# Altium PCB brushless.PcbDoc
Units mil, origin at the board's own origin, x right, y up, seen from the top; angles counter-clockwise.
Board outline 2625.03 x 1735.03 mil, 2 copper layers (Top Layer, Bottom Layer); 92 components, 82 nets, 329 pads, 108 vias.
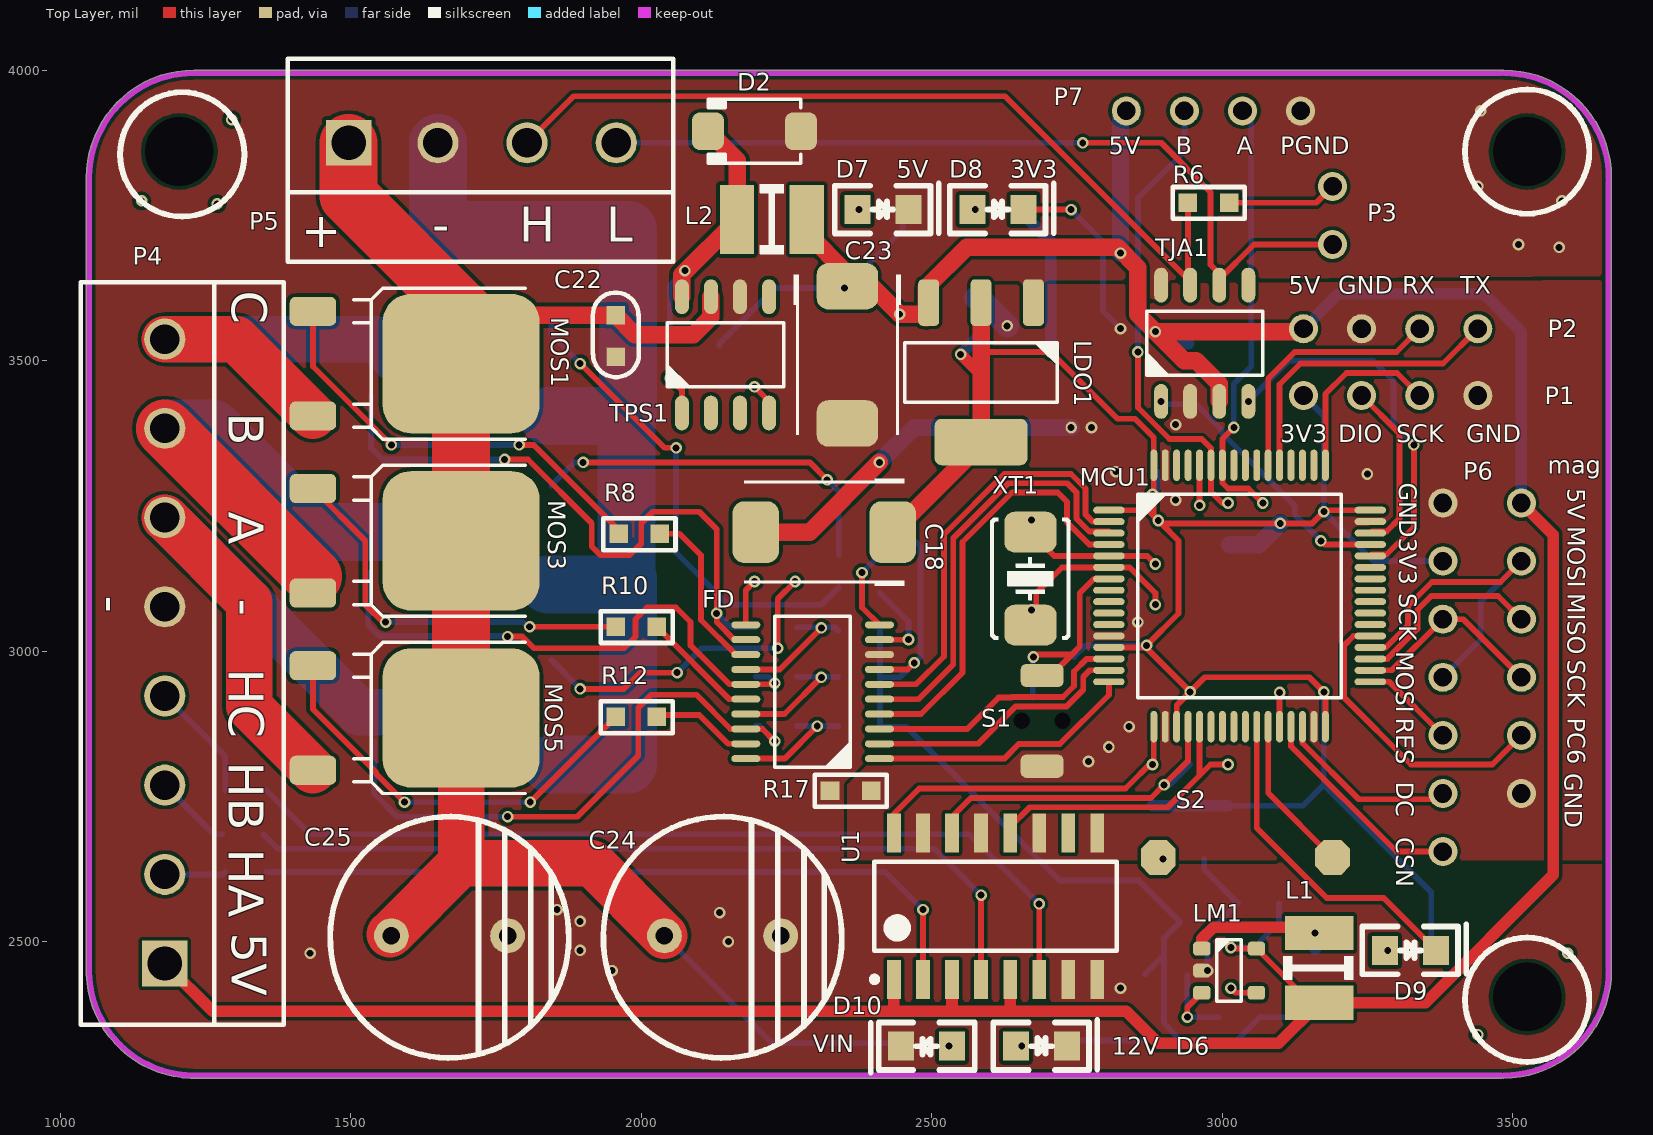
[diagram p0: Top Layer view]
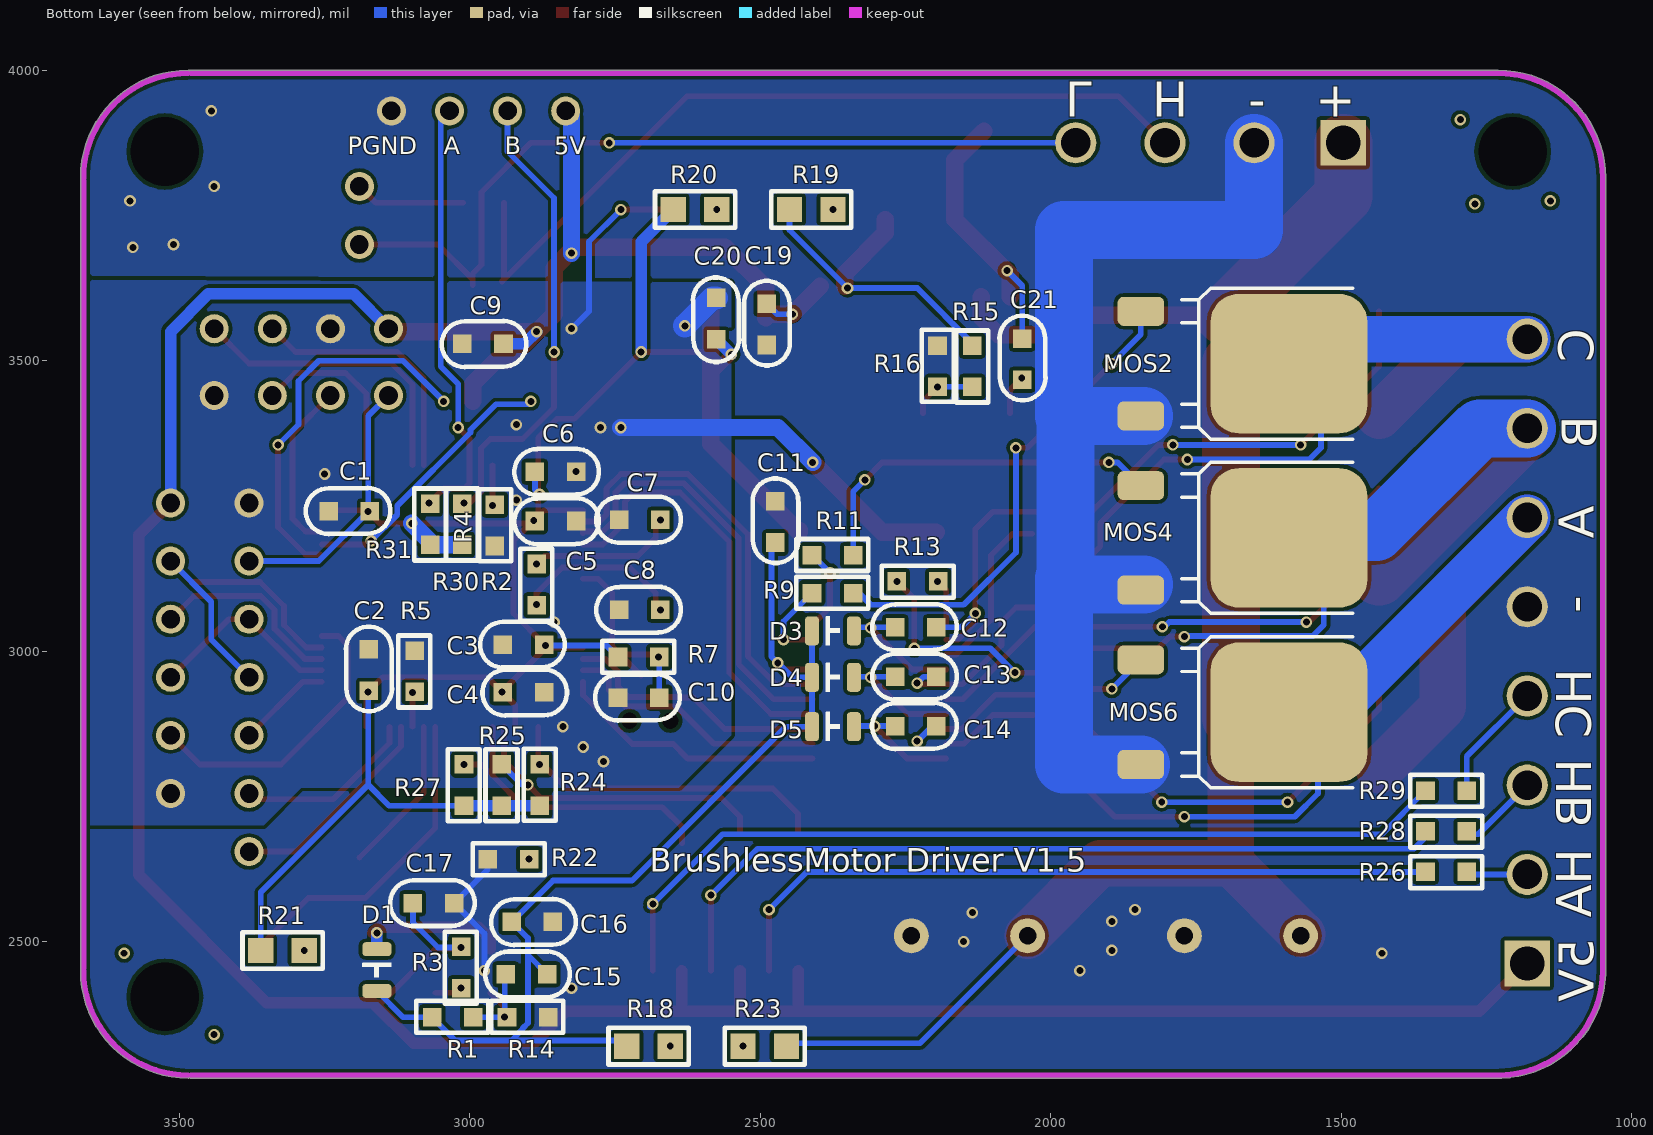
[diagram p1: Bottom Layer view, seen from below]
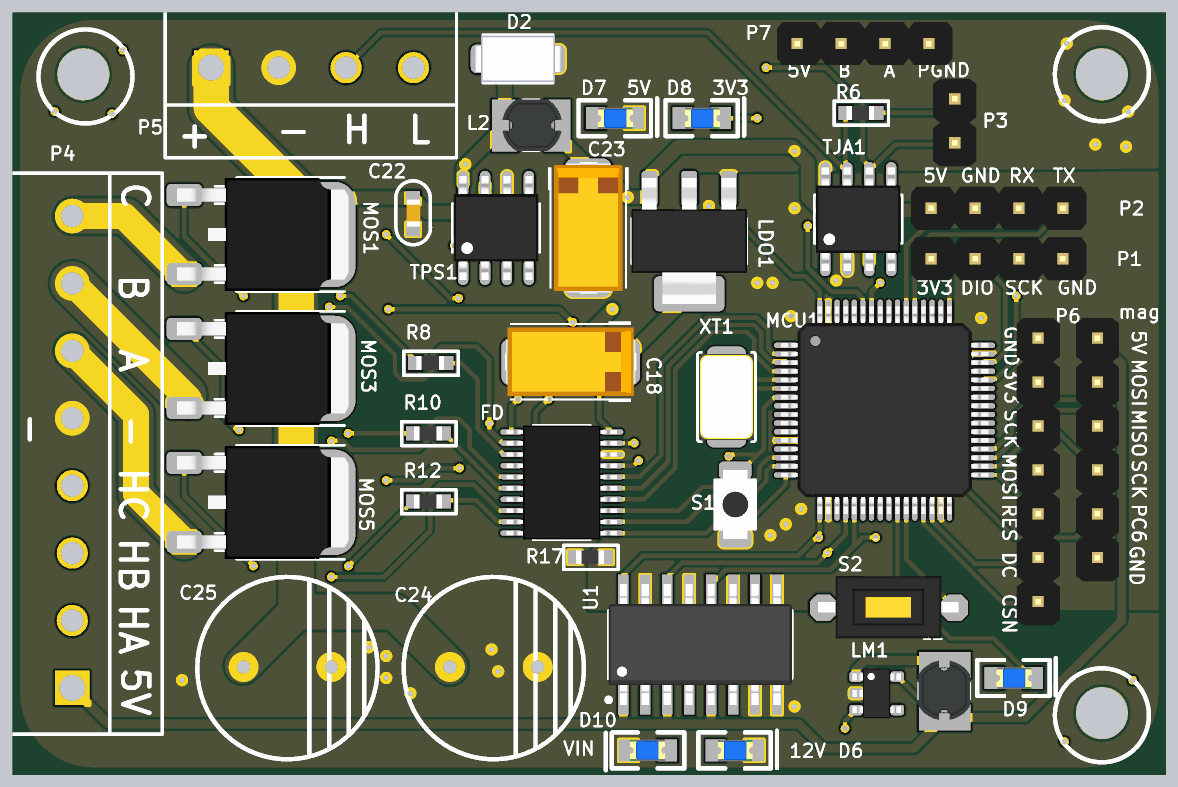
[diagram p2: 3D render of the assembled board from above, using the file's embedded part models]
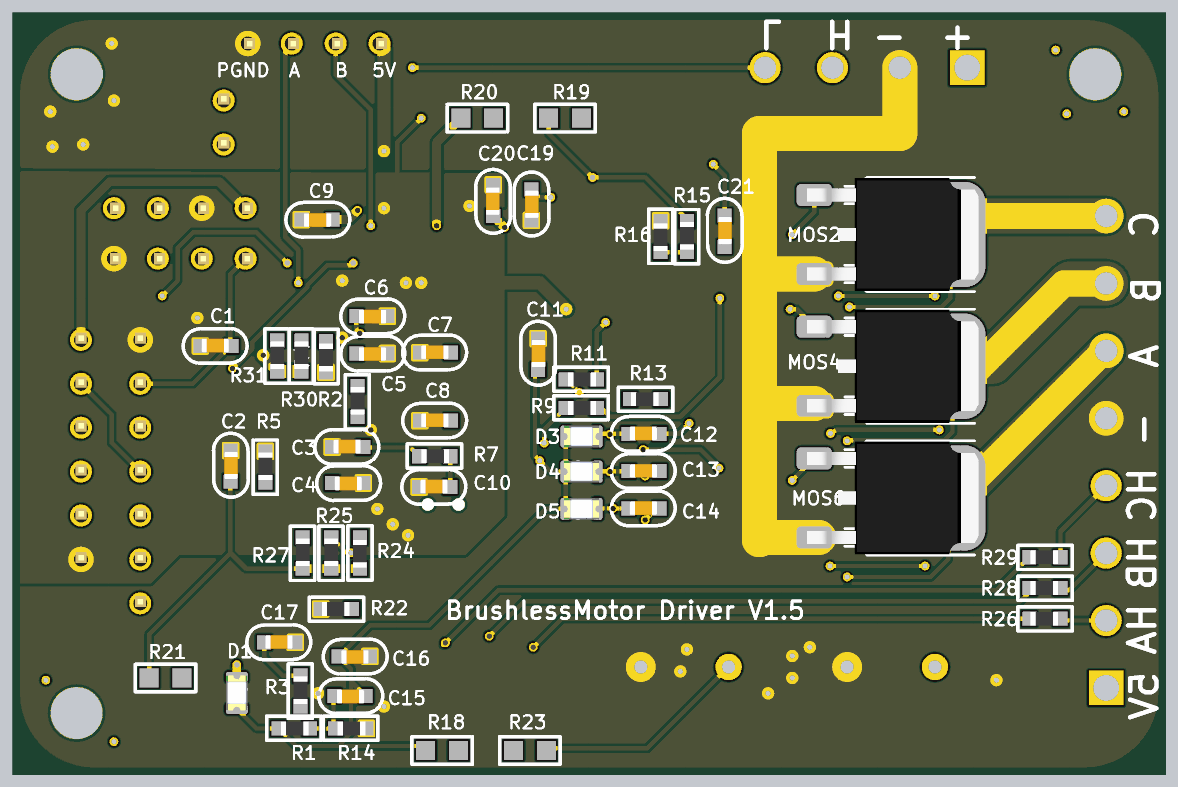
[diagram p3: 3D render of the assembled board from below, using the file's embedded part models]

## Layer stack, top to bottom
Top Solder: solder mask 0.4, Solder Resist, Dk 3.5
Top Layer: signal copper 1.4
Dielectric1: dielectric 12.6, FR-4, Dk 4.8
Bottom Layer: signal copper 1.4
Bottom Solder: solder mask 0.4, Solder Resist, Dk 3.5

## Board outline
1224.02,2265.08 ccw(c1225,2270) 1225,2264.99 3480,2264.99 ccw(c3480,2270) 3482.5,2265.65 ccw(c3485,2270) 3485,2264.99 ccw(c3485,2450) 3670.01,2450 ccw(c3665,2450) 3669.35,2452.5 ccw(c3665,2455) 3670.01,2455 3670.01,3810 ccw(c3665,3810) 3669.35,3812.5 ccw(c3665,3815) 3670.01,3815 ccw(c3485,3815) 3485,4000.01 ccw(c3485,3995) 3482.5,3999.35 ccw(c3480,3995) 3480,4000.01 1230,4000.01 ccw(c1230,3815) 1044.98,3815 1044.98,2445 ccw(c1050,2445) 1045.08,2444.02 ccw(c1230,2450)

## Design rules (kind name [scope] priority, off if disabled: settings)
Clearance [All] p1: gap=6 ignorepadtopadclearanceinfootprint=FALSE except(0: Arc-Hole Track-Hole SMDPad-Hole THPad-Hole Via-Hole Fill-Hole Poly-Hole Region-Hole Text-Hole)
PlaneConnect [All] p1: planeconnectstyle=Direct reliefexpansion=20 reliefentries=4 reliefconductorwidth=10 reliefairgap=10
PolygonConnect [All] p1: connectstyle=Direct reliefconductorwidth=10 reliefentries=4 polygonreliefangle="90 Angle" airgapwidth=10
RoutingVias [All] p1: holewidth=28 width=50 viastyle="Through Hole" minholewidth=28 minwidth=50 maxholewidth=28 maxwidth=50
SolderMaskExpansion [All] p1: expansion=4
Width [All] p1: maxlimit=100 minlimit=10 preferedwidth=10 minimp=50.000000 maximp=50.000000 favimp=50.000000
29 further rules are at their usual default settings.

## Components (designator, comment, footprint, x,y, rotation, side; value= is the part's Value field where it differs from the comment)
C1 "Cap_0603" CAP_0603 3210,3240 r180 bottom value=0.1u
C2 "Cap_0603" CAP_0603 3175,2970 r270 bottom value=0.1u
C3 "Cap_0603" CAP_0603 2910,3010 r180 bottom value=0.1u
C4 "Cap_0603" CAP_0603 2905,2930 r0 bottom value=0.1u
C5 "Cap_0603" CAP_0603 2850,3225 r0 bottom value=0.1u
C6 "Cap_0603" CAP_0603 2850,3310 r0 bottom value=0.1u
C7 "Cap_0603" CAP_0603 2710,3225 r180 bottom value=20pf
C8 "Cap_0603" CAP_0603 2710,3070 r180 bottom value=20pf
C9 "Cap_0603" CAP_0603 2975,3530 r0 bottom value=0.1uF
C10 "Cap_0603" CAP_0603 2712,2919 r180 bottom value=0.1u
C11 "Cap_0603" CAP_0603 2475,3225 r270 bottom value=0.1u
C12 "Cap_0603" CAP_0603 2235,3040 r180 bottom value=0.1u
C13 "Cap_0603" CAP_0603 2235,2955 r180 bottom value=0.1u
C14 "Cap_0603" CAP_0603 2235,2870 r180 bottom value=0.1u
C15 "Cap_0603" CAP_0603 2900,2445 r0 bottom value=220pf
C16 "Cap_0603" CAP_0603 2890,2535 r0 bottom value=10uF
C17 "Cap_0603" CAP_0603 3065,2565 r180 bottom value=0.1uF
C18 "Cap_Tan_2917" CAP_TAN_D2917 2315,3205 r180 top value=?F
C19 "Cap_0603" CAP_0603 2490,3565 r270 bottom value=0.1uF
C20 "Cap_0603" CAP_0603 2575,3570 r90 bottom value=0.1uF
C21 "Cap_0603" CAP_0603 2050,3505 r270 bottom value=0.1uF
C22 "Cap_0603" CAP_0603 1955,3545 r270 top value=10uF
C23 "Cap_Tan_2917" CAP_TAN_D2917 2355,3510 r270 top value=?F
C24 "*μF" C_ELE2 2040,2510 r0 top
C25 "*μF" C_ELE2 1570,2510 r0 top
D1 "D_0805" LED_0805_YELLOW 3160,2451 r270 bottom
D2 "Diode_SMA" DO-214AC 2195,3895 r180 top value=1N?
D3 "D_0805" LED_0805_YELLOW 2375,3035 r180 bottom
D4 "D_0805" LED_0805_YELLOW 2375,2955 r180 bottom
D5 "D_0805" LED_0805_YELLOW 2375,2870 r180 bottom
D6 "lED" 0805D 2645,2320 r0 top
D7 "lED" 0805D 2372,3760 r0 top
D8 "lED" 0805D 2570,3760 r0 top
D9 "lED" 0805D 3280,2485 r0 top
D10 "lED" 0805D 2535,2320 r180 top
FD "FD6288" TSSOP_E170_P0.65_20 2295,2930.16 r180 top
L1 "Ind_CD32" IND_CD52 3160,2455 r90 top value=10uH
L2 "Ind_CD32" IND_CD52 2225,3750 r0 top value=10uH
LDO1 "LDO1117" SOT223-3 2585,3480 r180 top
LM1 "LM27313" SOT23-5 3012,2450 r0 top
mag "HDR1x6_2.54" HDR1X6_2.54_180 3515,3255 r0 top
MCU1 "STM32F103RC" LQFP_P0.5_64 3030,3095 r0 top
MOS1 "MOSFET_N" TO-252AA 1435,3585 r270 top value=NMOS?
MOS2 "MOSFET_N" TO-252AA 1845,3585 r270 bottom value=NMOS?
MOS3 "MOSFET_N" TO-252AA 1435,3280 r270 top value=NMOS?
MOS4 "MOSFET_N" TO-252AA 1845,3285 r270 bottom value=NMOS?
MOS5 "MOSFET_N" TO-252AA 1435,2975 r270 top value=NMOS?
MOS6 "MOSFET_N" TO-252AA 1845,2985 r270 bottom value=NMOS?
P1 "HDR1x4_2.54" HDR1x4_2.54_180 3140,3440 r90 top
P2 "HDR1x4_2.54" HDR1x4_2.54_180 3140,3555 r90 top
P3 "HDR1x2_2.54" HDR1X2_2.54_180 3190,3800 r0 top
P4 "Header 8" Green_8P 1085,2537.28 r90 top
P5 "Header 4" Green_4P 1571.46,3970 r0 top
P6 "HDR1x7_2.54" HDR1X7_2.54_180 3380,3255 r0 top
P7 "HDR1x4_2.54" HDR1x4_2.54_180 2835,3930 r90 top
R1 "Res_0603" RES_0603 3028,2452 r180 bottom value=10K
R2 "Res_0603" RES_0603 2967,3116 r90 bottom value=1M
R3 "Res_0603" RES_0603 3097,2457 r90 bottom value=500
R4 "Res_0603" RES_0603 2875,3215 r270 bottom value=10K
R5 "Res_0603" RES_0603 3177,2967 r90 bottom value=10K
R6 "Res_0603" RES_0603 2975,3690 r180 top value=120R
R7 "Res_0603" RES_0603 2708,3072 r180 bottom value=10K
R8 "Res_0603" RES_0603 1995,3120 r180 top value=10R
R9 "Res_0603" RES_0603 2374,3182 r180 bottom value=10R
R10 "Res_0603" RES_0603 1990,2960 r180 top value=10R
R11 "Res_0603" RES_0603 2374,3247 r180 bottom value=10R
R12 "Res_0603" RES_0603 1990,2805 r180 top value=10R
R13 "Res_0603" RES_0603 2231,3038 r0 bottom value=10R
R14 "Res_0603" RES_0603 2899,2452 r180 bottom value=1K
R15 "Res_0603" RES_0603 2217,3492 r90 bottom value=10K
R16 "Res_0603" RES_0603 2113,3489 r270 bottom value=3.3K
R17 "Res_0603" RES_0603 2359,2678 r180 top value=0R
R18 "Res1" RES-0603 2655,2320 r180 bottom value=10K
R19 "Res1" RES-0603 2375,3760 r180 bottom value=10K
R20 "Res1" RES-0603 2575,3760 r180 bottom value=10K
R21 "Res1" RES-0603 3285,2485 r180 bottom value=10K
R22 "Res_0603" RES_0603 2935,2560 r0 bottom value=10K
R23 "Res1" RES-0603 2530,2320 r0 bottom value=10K
R24 "Res_0603" RES_0603 2798,2768 r270 bottom value=4.7K
R25 "Res_0603" RES_0603 3027,2771 r90 bottom value=4.7K
R26 "Res_0603" RES_0603 1321,2538 r0 bottom value=330
R27 "Res_0603" RES_0603 3092,2771 r90 bottom value=4.7K
R28 "Res_0603" RES_0603 1321,2608 r0 bottom value=330
R29 "Res_0603" RES_0603 1321,2678 r0 bottom value=330
R30 "Res_0603" RES_0603 3095,3220 r90 bottom value=4.7K
R31 "Res_0603" RES_0603 3150,3220 r90 bottom value=4.7K
S1 "ButtonTACT_3x4x2_180" ButtonTACT_3x4x2_180H 2690,2880 r270 top
S2 "SW-PB" "key - duplicate" 3070,2645 r180 top
TJA1 "TJA1050" SOP_E150_8 2970,3530 r90 top
TPS1 "TPS5430" SOP_E150_8 2145,3510 r90 top
U1 "TLP281-4" SOP127P700X210-16N 2610,2560.98 r90 top
XT1 "XTAL_5032_2P" XT_5032_2 2670,3125 r90 top value=8M

## Footprints (in the part's own frame and the unit in brackets; to place one, negate y for a bottom-side part, rotate by r counter-clockwise, add the part's x,y. Pads: shape width x height; smd on the part's side, far side on the other; paste and mask are expansions set on the pad)
0805D [mil]
  rect 45x50 smd: A(0,0) K(88,0)
  silkscreen extent -39,-41 140,45, body extent 5,-25 85,24, height 43
ButtonTACT_3x4x2_180H [mil]
  round 0 hole 28: 0(0,35) 0(0,-35)
  rrect50% 40x74 smd: 1(-78,0) 2(78,0)
  body extent -79,-49 79,49, height 63
C_ELE2 [mil]
  round 60 hole 30: 1(0,0) 2(200,0)
  silkscreen extent -105,-210 305,205
CAP_0603 [mil]
  rect 32x32 smd: 1(-33,1) 2(38,1)
  silkscreen extent -72,-38 73,41, body extent -30,-14 33,18, height 31
CAP_TAN_D2917 [mil]
  rrect50% 80x106 smd: 1(-118,0) 2(118,0)
  silkscreen extent -138,-92 138,92, body extent -150,-78 150,78, height 122
DO-214AC [mil] "SMA"
  rrect50% 55x65 smd: 1(-80,0) 2(80,0)
  silkscreen extent -80,-55 80,55, body extent -98,-53 98,53, height 85
Green_4P [mm]
  rect 2x2 hole 1.5: 1(-1.905,-2.413)
  round 1.8 hole 1.3: 2(1.995,-2.413) 3(5.895,-2.413) 4(9.795,-2.413)
  silkscreen extent -4.57,-7.62 12.28,1.27
Green_8P [mm]
  rect 2x2 hole 1.5: 1(-1.905,-2.413)
  round 1.8 hole 1.3: 2(1.995,-2.413) 3(5.895,-2.413) 4(9.795,-2.413) 5(13.695,-2.413) 6(17.595,-2.413) 7(21.495,-2.413) 8(25.395,-2.413)
  silkscreen extent -4.57,-7.62 27.88,1.27
HDR1X2_2.54_180 [mil]
  round 50 hole 32: 1(0,0) 2(0,-100)
  body extent -49,-150 49,50, height 323
HDR1x4_2.54_180 [mil]
  round 50 hole 32: 1(0,0) 2(0,-100) 3(0,-200) 4(0,-300)
  body extent -49,-350 49,50, height 323
HDR1X6_2.54_180 [mil]
  round 50 hole 32: 1(0,0) 2(0,-100) 3(0,-200) 4(0,-300) 5(0,-400) 6(0,-500)
  body extent -49,-550 49,50, height 323
HDR1X7_2.54_180 [mil]
  round 50 hole 32: 1(0,0) 2(0,-100) 3(0,-200) 4(0,-300) 5(0,-400) 6(0,-500) 7(0,-600)
  body extent -49,-650 49,50, height 323
IND_CD52 [mil]
  rect 59.06x118.11 smd: 1(-60,-7) 2(60,-7)
  silkscreen extent -20,-66 20,54, body extent -66,-65 70,53, height 83
"key - duplicate" [mil]
  oct 60x60 smd: 1(-120,0) 2(180,0)
  body extent -129,-72 192,70, height 98
LED_0805_YELLOW [mil]
  rrect50% 24x50 smd: 1(-36,0) 2(36,0)
  silkscreen extent -12,-24 12,25, body extent -40,-25 40,25, height 43
LQFP_P0.5_64 [mil]
  oval 54x12 smd: 1(-225,147.64) 2(-225,127.95) 3(-225,108.27) 4(-225,88.58) 5(-225,68.9) 6(-225,49.21) 7(-225,29.53) 8(-225,9.84) 9(-225,-9.84) 10(-225,-29.53) 11(-225,-49.21) 12(-225,-68.9) 13(-225,-88.58) 14(-225,-108.27) 15(-225,-127.95) 16(-225,-147.64) 33(225,-147.64) 34(225,-127.95) 35(225,-108.27) 36(225,-88.58) 37(225,-68.9) 38(225,-49.21) 39(225,-29.53) 40(225,-9.84) 41(225,9.84) 42(225,29.53) 43(225,49.21) 44(225,68.9) 45(225,88.58) 46(225,108.27) 47(225,127.95) 48(225,147.64)
  oval 12x54 smd: 17(-147.64,-225) 18(-127.95,-225) 19(-108.27,-225) 20(-88.58,-225) 21(-68.9,-225) 22(-49.21,-225) 23(-29.53,-225) 24(-9.84,-225) 25(9.84,-225) 26(29.53,-225) 27(49.21,-225) 28(68.9,-225) 29(88.58,-225) 30(108.27,-225) 31(127.95,-225) 32(147.64,-225) 49(147.64,225) 50(127.95,225) 51(108.27,225) 52(88.58,225) 53(68.9,225) 54(49.21,225) 55(29.53,225) 56(9.84,225) 57(-9.84,225) 58(-29.53,225) 59(-49.21,225) 60(-68.9,225) 61(-88.58,225) 62(-108.27,225) 63(-127.95,225) 64(-147.64,225)
  silkscreen extent -175,-175 175,175, body extent -236,-236 236,236, height 59
RES-0603 [mm]
  rect 1.1x1.1 smd: 1(0,0) 2(-1.9,0)
  silkscreen extent -2.7,-0.8 0.8,0.8, body extent -1.8,-0.47 -0.1,0.48, height 0.6
RES_0603 [mil]
  rect 32x32 smd: 1(-37,-82) 2(34,-82)
  silkscreen extent -64,-109 60,-54, body extent -31,-98 31,-66, height 18
SOP127P700X210-16N [mm] "SOP, 16-Leads, Body 10.35x4.55mm, Pitch 1.27mm, IPC Medium Density"
  rect 1.7x0.6 smd: 1(-3.2,4.445) 2(-3.2,3.175) 3(-3.2,1.905) 4(-3.2,0.635) 5(-3.2,-0.635) 6(-3.2,-1.905) 7(-3.2,-3.175) 8(-3.2,-4.445) 9(3.2,-4.445) 10(3.2,-3.175) 11(3.2,-1.905) 12(3.2,-0.635) 13(3.2,0.635) 14(3.2,1.905) 15(3.2,3.175) 16(3.2,4.445)
  silkscreen extent -3.32,-5.3 1.95,5.42, body extent -3.5,-5.3 3.5,5.3, height 2.1
SOP_E150_8 [mil]
  oval 60x24 smd: 1(-100,75) 2(-100,25) 3(-100,-25) 4(-100,-75) 5(100,-75) 6(100,-25) 7(100,25) 8(100,75)
  silkscreen extent -55,-100 55,100, body extent -118,-96 118,96, height 69
SOT23-5 [mil]
  rrect50% 30x24 smd: 1(-47,38) 2(-47,0) 3(-47,-38) 4(47,-38) 5(47,38)
  silkscreen extent -21,-53 21,53, body extent -55,-57 55,57, height 57
SOT223-3 [mil]
  rrect40% 36x80 smd: 1(-90.16,-120) 2(0,-120) 3(90.16,-120)
  rrect30% 160x80 smd: 4(0,120)
  silkscreen extent -131,-51 131,51, body extent -132,-144 132,144, height 71
TO-252AA [mil]
  rrect40% 50x80 smd: 1(0,0) 3(180,0)
  rrect40% 240x270 smd: 4(90,255)
  silkscreen extent -40,70 220,365, body extent -39,-17 219,374, height 91
TSSOP_E170_P0.65_20 [mil]
  oval 50x12 smd: 1(-115,115.16) 2(-115,89.57) 3(-115,63.98) 4(-115,38.39) 5(-115,12.8) 6(-115,-12.8) 7(-115,-38.39) 8(-115,-63.98) 9(-115,-89.57) 10(-115,-115.16) 11(115,-115.16) 12(115,-89.57) 13(115,-63.98) 14(115,-38.39) 15(115,-12.8) 16(115,12.8) 17(115,38.39) 18(115,63.98) 19(115,89.57) 20(115,115.16)
  silkscreen extent -65,-130 65,130, body extent -126,-130 126,130, height 42
XT_5032_2 [mil]
  rrect50% 70x90 smd: 1(-80,0) 2(80,0)
  silkscreen extent -104,-68 104,68, body extent -98,-63 98,63, height 39

## Part data
C1 C2 C3 C4 C5 C6 C7 C8 C9 C10 C11 C12 C13 C14 C15 C16 C17 C18 C19 C20 C21 C22 C23: "Capacitor"
C24 C25: library part CAP-ELE, "电解电容", LatestRevisionDate=17-Jul-2002, LatestRevisionNote="Re-released for DXP Platform.", PackageDescription="Polarized Capacitor (Radial); 2 Leads", PackageReference=RB7.6-15, Published=8-Jun-2000, Publisher="Altium Limited"
D2: "Diode"
D6 D7 D8 D9 D10: library part 00-D-LED, "LED"
L1 L2: "Inductor"
LDO1: "Power"
mag P1 P2 P3 P7: "Header"
MCU1: "MCU"
MOS1 MOS2 MOS3 MOS4 MOS5 MOS6: "MOSFET"
P4: "Header, 8-Pin", LatestRevisionDate=17-Jul-2002, LatestRevisionNote="Re-released for DXP Platform.", Publisher="Altium Limited"
P5: "Header, 4-Pin", LatestRevisionDate=17-Jul-2002, LatestRevisionNote="Re-released for DXP Platform.", Publisher="Altium Limited"
P6: library part HDR1x7_2.54T, "Header"
R1 R2 R3 R4 R5 R6 R7 R8 R9 R10 R11 R12 R13 R14 R15 R16 R17 R22 R24 R25 R26 R27 R28 R29 R30 R31: "Resistor"
R18 R19 R20 R21 R23: library part Res1_1, "Resistor", LatestRevisionDate=17-Jul-2002, LatestRevisionNote="Re-released for DXP Platform.", PackageReference=AXIAL-0.3, Published=8-Jun-2000, Publisher="Altium Limited"
S1: "Button"
S2: "Switch", LatestRevisionDate=17-Jul-2002, LatestRevisionNote="Re-released for DXP Platform.", PackageDescription="Switch; 2 Leads", PackageReference=SPST-2, Published=24-Mar-1999, Publisher="Altium Limited"
U1: library part IC-TLP281-4
XT1: "Crystal Oscillator"

## Free pads (board coordinates)
  round 30 hole 118.11: 3(1205,3860) 3(3525,2405) 3(3525,3860)

## Via types
v1: diameter 20, hole 12, Top Layer to Bottom Layer, 108 vias

## Nets (pads, with @x,y where several pads share a name; then routed paths per layer and width w, separated by ;. In a path a pad name is that pad's centre, name@x,y a point inside that pad or via, vN(x,y) a via of type N, cw(c..) or ccw(c..) an arc to the next point about the centre after c; other vN are vias at no path point)
3V3: C1.2 C2.2 C3.2 C4.2 C5.2 C6.2 C18.1 C20.1 LDO1.2 LDO1.4 MCU1.1 MCU1.13 MCU1.19 MCU1.32 MCU1.48 MCU1.64 P1.1 P6.2 R7.1 R20.2 R21.2 R24.2 R25.1 R27.1 R30.1 R31.1 | length 4147.6
  Top Layer w10: 2585,3520 2590,3515 v1(2705,3515) 2820,3400 2850,3400 2882.36,3367.64 MCU1.64 2882.36,3232.64 ; MCU1.13 2866.42,3006.42 v1(2870,3010) ; MCU1.1 2872.36,3242.64 2882.36,3232.64 ; MCU1.19 2921.73,2906.73 v1(2945,2930) ; MCU1.32 3177.64,2927.36 v1(3175,2930) 3150,2955 2970,2955 v1(2945,2930) ; MCU1.48 3177.64,3242.64 v1(3175,3240) 3155,3220 v1(3100,3220) v1@2895,3220 ; v1(2870,3010) 2870,3005 v1(2945,2930) ; v1(2870,3010) 2925,3065 2925,3190 v1@2895,3220 ; 2882.36,3232.64 v1(2890,3225) v1@2895,3220
  Top Layer w20: v1(2550,3511) 2585,3476
  Top Layer w30: C18.1@2433,3208 C18.1 2585,3357 LDO1.4 2585,3476 2585,3520 LDO1.2
  Bottom Layer w10: R7.1 2765,3010 v1(2870,3010) ; v1(2880,3270) 2888,3278 C6.2 ; R27.1 3139,2734 3175,2770 ; P1.1 3175,3405 v1(3175,3240) 3260,3155 P6.2 ; v1(3175,2930) 3175,2770 ; R21.2 3359.8,2585.2 3175,2770
  Bottom Layer w20: v1(2550,3511) C20.1 ; R20.2 2705,3704.8 v1(2705,3515) ; R24.2 R25.1 R27.1
  Bottom Layer w30: R30.1 3063,3183 v1(3100,3220)
5V: C9.1 C17.1 C19.1 C23.1 L1.1 L2.2 LDO1.3 LM1.5 mag.1 P2.1 P4.1 P7.1 R3.2 R15.2 R19.2 TJA1.3 U1.1 U1.3 U1.5 | length 6575.6
  Top Layer w10: v1(3015,2490) 3015,2488 LM1.5 3152,2395 L1.1
  Top Layer w20: P4.1 1262.28,2380 2440,2380 ; U1.1@2435,2450 U1.1 2435,2385 2440,2380 ; U1.3@2535,2450 U1.3 2535,2380 ; U1.5@2635,2450 U1.5 2635,2380 ; mag.1 3570,3200 3570,2615 3350,2395 L1.1 3097,2325 2890,2325 2835,2380 2635,2380 ; 2440,2380 2535,2380 ; 2535,2380 2635,2380
  Top Layer w30: L2.2 2285,3720 2355,3650 C23.1 ; C23.1@2396.94,3628 v1(2445,3579.94) 2485.06,3579.94 2490.94,3574.06 2490.94,3625.94 2560,3695 2820,3695 2855,3660 2855,3580 v1(2885,3550) ; TJA1.3 2995,3460 2955,3500 2935,3500 v1(2885,3550) ; P2.1 3135,3550 v1(2885,3550)
  Bottom Layer w10: R15.2 2135,3530 2230,3625 v1(2350,3625) 2449.8,3724.8 R19.2 ; v1(2445,3579.94) 2470.94,3579.94 C19.1 ; v1(3015,2490) 3055,2490 3098,2533 C17.1
  Bottom Layer w20: v1(2885,3550) 2906,3529 C9.1 ; P2.1@3134,3561 P2.1 3200,3615 3450,3615 3515,3550 mag.1
  Bottom Layer w30: v1(2825,3685) 2825,3920 P7.1
12V: C11.2 C15.1 C16.2 D1.2 D3.1 D4.1 D5.1 FD.7 R1.1 R18.2 | length 1899.2
  Top Layer w10: FD.7 2458.54,2968.54 v1(2470,2980)
  Bottom Layer w10: D3.1 D4.1 ; C11.2 2481,3180 2481,2991 v1(2470,2980) 2445,2955 D4.1 ; R18.2@2739.8,2330 2928.44,2330 ; C15.1 2900,2477 ; D1.2 3115,2370 R1.1 3025,2330 2928.44,2330 ; D4.1 D5.1 2456,2870 2721,2605 2857,2605 C16.2 2900,2506 2900,2477 ; 2900,2477 2900,2360 2909,2351 2909,2349.44 2928.44,2330
A: C14.2 FD.18 MOS5.3 MOS6.4 P4.6 | length 2098.2
  Top Layer w10: v1(1770,2715) 1890,2715 1995,2820 1995,2902.56 2017.44,2925 2095,2925 2153.82,2866.18 FD.18 2208.82,2866.18 v1(2230,2845)
  Top Layer w80: P4.6 1325,3085 1325,2905 MOS5.3
  Bottom Layer w10: MOS6.4@1540,2845 1540,2755 1580,2715 v1(1770,2715) ; C14.2 2204,2871 v1(2230,2845)
  Bottom Layer w80: P4.6 1515,2895 MOS6.4
B: C13.2 FD.15 MOS3.3 MOS4.4 P4.7 | length 1809.2
  Top Layer w10: v1(1770,3025) 1795.3,3025 1815.3,3005 1970,3005 1990,3025 1990,3055 2010,3075 2060,3075 2085,3050 2085,3010 2152.05,2942.95 FD.15 2227.95,2942.95 v1(2230,2945)
  Top Layer w100: P4.7 1435,3128.54
  Bottom Layer w10: MOS4.4@1530,3135 1530,3045 1549,3026 1769,3026 v1(1770,3025) ; C13.2 2219,2956 v1(2230,2945)
  Bottom Layer w100: P4.7 1261.46,3383.54 1440,3205 MOS4.4@1585,3205
BOOT0: MCU1.60 R4.1 | length 68.9
  Top Layer w10: v1(2961.1,3251.1) MCU1.60
BOOT1: MCU1.28 R5.1 | length 58.9
  Top Layer w10: MCU1.28 v1(3098.9,2928.9)
C: C12.2 FD.12 MOS1.3 MOS2.4 P4.8 | length 1880.7
  Top Layer w10: v1(1765,3330) 1805,3330 1915,3220 1915,3180 1930,3165 1980,3165 2000,3185 2000,3220 2020,3240 2100,3240 2130,3210 v1(2130,3065) 2130,3050 2160.28,3019.72 FD.12
  Top Layer w80: P4.8 1302.91,3537.09 MOS1.3
  Bottom Layer w10: MOS2.4@1535,3440 1535,3350 1555,3330 v1(1765,3330) ; v1(2130,3065) 2154,3041 C12.2
  Bottom Layer w80: P4.8 1542.91,3537.09 MOS2.4@1585,3495
CAN_H: P5.3 R6.2 TJA1.7 | length 1438.6
  Top Layer w10: P5.3 1883.54,3955 2626.06,3955 TJA1.7@2941,3640.06 ; R6.2 TJA1.7@2941,3640.06 ; TJA1.7@2945,3636.06 TJA1.7@2941,3640.06
CAN_L: P3.2 P5.4 TJA1.6 | length 1444.2
  Top Layer w10: v1(2760,3875) 2895,3875 2980,3790 2980,3665 2995,3650 TJA1.6@2995,3640 ; TJA1.6 TJA1.6@2995,3640 ; P3.2 3055,3700 TJA1.6@2995,3640
  Bottom Layer w10: P5.4 v1(2760,3875)
CAN_RX: MCU1.44 TJA1.4 | length 655
  Top Layer w10: MCU1.44 3257.69,3166.58 3283.04,3166.58 3330,3213.54 v1(3330,3355)
  Bottom Layer w10: v1(3045,3430) 3115,3500 3260,3500 3295,3465 3295,3390 v1(3330,3355)
CAN_TX: MCU1.45 TJA1.1 | length 473.8
  Top Layer w10: v1(3170,3190) 3176.42,3183.58 MCU1.45
  Bottom Layer w10: v1(2895,3430) 2900,3425 2955,3425 2999,3381 2999,3376.3 3125,3250.3 3125,3235 v1(3170,3190)
CH1: FD.3 MCU1.14 | length 459.6
  Top Layer w10: FD.3 2561.18,2866.18 2615,2920 2637.02,2920 2638.02,2921 2726,2921 2745,2940 2745,2965 2766.73,2986.73 MCU1.14
CH1_L: FD.4 MCU1.4 | length 742.3
  Top Layer w10: FD.4 2481.77,2891.77 2553,2963 2553,3187.75 2638.25,3273 2717,3273 2733,3257 2733,3221.75 2771.16,3183.58 MCU1.4
CH2: FD.2 MCU1.15 | length 460.6
  Top Layer w10: FD.2 2580.24,2840.59 2644.64,2905 2732.63,2905 2761,2933.37 2761,2956 2772.05,2967.05 MCU1.15
CH2_L: FD.5 MCU1.3 | length 739.7
  Top Layer w10: FD.5 2477.36,2917.36 2537,2977 2537,3194.37 2631.63,3289 2733.37,3289 2749,3273.37 2749,3228.37 2771.42,3205.95 2805,3205.95 MCU1.3
CH3: FD.1 MCU1.16 | length 463.1
  Top Layer w10: FD.1 2625,2815 2650,2840 2720.36,2840 2805,2924.64 MCU1.16
CH3_L: FD.6 MCU1.2 | length 728.3
  Top Layer w10: FD.6 2472.95,2942.95 2521,2991 2521,3201 2625,3305 2740,3305 2765,3280 2765,3235 2777.05,3222.95 MCU1.2
CSN: MCU1.29 P6.7 | length 370.1
  Top Layer w10: MCU1.29 3118.58,2836.42 3300,2655 P6.7
CSN_MAG: mag.5 MCU1.37 | length 515
  Top Layer w10: MCU1.37 3226.1,3026.1 3210,3010 3210,2920 3325,2805 3465,2805 mag.5
DC: MCU1.30 P6.6 | length 314.2
  Top Layer w10: MCU1.30 3138.27,2841.73 3235,2745 3370,2745 P6.6
GND: C1.1 C2.1 C3.1 C4.1 C5.1 C6.1 C7.1 C8.1 C9.2 C10.1 C18.2 C20.2 D8.K mag.6 MCU1.12 MCU1.18 MCU1.31 MCU1.47 MCU1.63 P1.4 P2.2 P6.1 R4.2 R5.2 R17.1 S1.2 TJA1.2 U1.9 U1.11 U1.13 U1.15 | length 1013.6
  Top Layer w10: D8.K v1(2740,3760)
  Top Layer w30: C18.2 2290,3205 v1(2410,3325)
  Bottom Layer w10: v1(2740,3760) 2795,3705 2795,3585 v1(2825,3555)
  Bottom Layer w30: v1(2410,3325) 2470,3385 v1(2740,3385)
  Bottom Layer w40: C20.2 2582,3608 v1(2630,3560)
  other v1: 2770,2810 2805,2835 2840,2870 2855,3050 2920,3260 3250,3305 2817,3309 2775,3385 2920,3390
HALL1: MCU1.17 R24.1 U1.16 | length 576.3
  Top Layer w10: U1.16 2435,2720 2478.43,2763.43 2833.43,2763.43 2882.36,2812.36 MCU1.17
  other v1: 2880,2805
HALL2: MCU1.20 R25.2 U1.14 | length 592.5
  Top Layer w10: U1.14 2535,2715 2567.43,2747.43 2877.43,2747.43 v1(2900,2770) 2941.42,2811.42 MCU1.20
  Bottom Layer w10: v1(2900,2770) 2910,2770 R25.2
HALL3: MCU1.21 R27.2 U1.12 | length 531.1
  Top Layer w10: U1.12@2635,2670 U1.12 2635,2697.8 2668.63,2731.43 2906.43,2731.43 2961.1,2786.1 ; MCU1.21 2961.1,2786.1 ; v1(3010,2805) 2980,2805 2961.1,2786.1
HALL_A: P4.2 R26.1 | length 105.7
  Bottom Layer w10: P4.2 1279.83,2615.83 R26.1
HALL_B: P4.3 R28.1 | length 133.9
  Bottom Layer w10: P4.3 1264.37,2685 R28.1@1279,2685
HALL_C: P4.4 R29.1 | length 206
  Bottom Layer w10: P4.4 1284,2818.91 R29.1
KEY: MCU1.27 S2.1 | length 270.9
  Top Layer w10: MCU1.27 3079.21,2755.79 S2.1
MISO: mag.3 MCU1.35 | length 340.5
  Top Layer w10: MCU1.35 3284.36,2986.73 3336,3038.37 3336,3071 3360,3095 3475,3095 mag.3
MOSI: mag.2 MCU1.36 P6.4 | length 596.6
  Top Layer w10: MCU1.36 3281.42,3006.42 3320,3045 3320,3077.63 3361.37,3119 3479,3119 mag.2
  Bottom Layer w10: P6.4 3445,3020 3445,3085 mag.2
NetC7_2: C7.2 MCU1.5 R2.2 XT1.2 | length 258.6
  Top Layer w10: XT1.2@2680,3230 2680,3195 2711.1,3163.9 MCU1.5 2871.1,3163.9 v1(2885,3150)
  other v1: 2672,3226
NetC8_2: C8.2 MCU1.6 R2.1 XT1.1 | length 291.6
  Top Layer w10: XT1.1@2680,3070 2680,3100 2724.21,3144.21 MCU1.6 2840.79,3144.21 2885,3100 v1(2885,3080)
  other v1: 2672,3071
NetC12_1: C12.1 D3.2 FD.14 | length 233.1
  Top Layer w10: FD.14 2238.54,2968.54 v1(2310,3040)
  Bottom Layer w10: C12.1 2333,3041 D3.2
NetC13_1: C13.1 D4.2 FD.17 | length 227.6
  Top Layer w10: FD.17 2246.77,2891.77 v1(2310,2955)
  Bottom Layer w10: C13.1 2338,2956 D4.2
NetC14_1: C14.1 D5.2 FD.20 | length 217.6
  Top Layer w10: FD.20 2247,2815 v1(2303,2871)
  Bottom Layer w10: C14.1 v1(2303,2871) 2338,2871 D5.2
NetC15_2: C15.2 LM1.3 R1.2 R14.1 | length 178.4
  Top Layer w10: v1(2940,2370) 2940,2387 LM1.3
  Bottom Layer w10: C15.2@2940,2442 v1(2940,2370) R1.2
NetC21_1: C21.1 D2.2 L2.1 TPS1.8 | length 472.8
  Top Layer w30: TPS1.8 2070,3648 L2.1 2165,3845 D2.2
  Bottom Layer w10: C21.1 2049,3629 v1(2075,3655)
NetC21_2: C21.2 TPS1.1 | length 61.2
  Top Layer w10: v1@2055,3465 2070,3450 TPS1.1
  other v1: 2050,3470
NetD1_1: D1.1 L1.2 LM1.1 | length 259.4
  Top Layer w20: LM1.1 2965,2505 2985,2525 3157,2525 L1.2
  Bottom Layer w20: D1.1 v1(3160,2515)
NetD6_A: D6.A R18.1
  other v1: 2655,2320
NetD7_A: D7.A R19.1
  other v1: 2375,3760
NetD8_A: D8.A R20.1
  other v1: 2575,3760
NetD9_A: D9.A R21.1
  other v1: 3285,2485
NetD10_A: D10.A R23.1
  other v1: 2530,2320
NetFD_9: FD.9 R9.1 | length 150.4
  Top Layer w10: FD.9 2459.72,3019.72 v1(2460,3020)
  Bottom Layer w10: R9.1 2460,3051 v1(2460,3020)
NetFD_10: FD.10 R11.1 | length 145.5
  Top Layer w10: v1(2380,3135) 2380,3075.31 FD.10
  Bottom Layer w10: v1(2380,3135) 2410,3165 R11.1
NetFD_11: FD.11 R13.1 | length 80.9
  Top Layer w10: FD.11 2180,3105 v1(2195,3120)
NetFD_13: FD.13 R8.1 | length 299.3
  Top Layer w10: R8.1 2066,3202 2103,3165 2103,3053.68 2162.55,2994.13 FD.13
NetFD_16: FD.16 R10.1 | length 204.6
  Top Layer w10: R10.1 2151.64,2917.36 FD.16
NetFD_19: FD.19 R12.1 | length 170.5
  Top Layer w10: R12.1@2030,2890 2100,2890 2149.41,2840.59 FD.19
NetLM1_4: LM1.4 R3.1 | length 47.3
  Top Layer w10: v1(3015,2420) 3023,2412 LM1.4
NetMOS1_1: MOS1.1 R8.2 | length 742.3
  Top Layer w10: MOS1.1 1435,3490 v1(1570,3355) ; v1(1790,3355) 1815,3355 R8.2@1964.5,3205.5
  Bottom Layer w10: v1(1570,3355) v1(1790,3355)
NetMOS2_1: MOS2.1 R9.2 | length 845.5
  Top Layer w10: v1(1895,3495) 2040,3350 v1(2060,3350)
  Bottom Layer w10: MOS2.1 1845,3545 v1(1895,3495) ; v1(2060,3350) 2060,3170 2150,3080 2310,3080 R9.2@2340,3110
NetMOS3_1: MOS3.1 R10.2 | length 681.4
  Top Layer w10: MOS3.1 1525,3190 1525,3080 v1@1557.5,3047.5 ; v1(1808,3042) R10.2
  Bottom Layer w10: v1(1560,3050) 1796,3050 v1@1806,3040
NetMOS4_1: MOS4.1 R11.2 | length 642.3
  Top Layer w10: v1(1900,3325) 2290,3325 v1(2320,3295)
  Bottom Layer w10: MOS4.1 1885,3325 v1(1900,3325) ; v1(2320,3295) 2340,3275 R11.2
NetMOS5_1: MOS5.1 R12.2 | length 724.6
  Top Layer w10: MOS5.1 1435,2900 1544,2791 1544,2788.56 v1(1592.56,2740) ; v1(1809,2740) R12.2
  Bottom Layer w10: v1(1592.56,2740) v1(1809,2740)
NetMOS6_1: MOS6.1 R13.2 | length 567.1
  Top Layer w10: v1(1895,2935) 1970,2935 1998,2963 v1(2062,2963) ; v1(2235,3005) 2235,3090 v1(2265,3120)
  Bottom Layer w10: MOS6.1 v1(1895,2935) ; v1(2062,2963) 2104,3005 v1(2235,3005)
NetP3_1: P3.1 R6.1 | length 189.6
  Top Layer w10: R6.1 3162,3772 P3.1
NetR15_1: R15.1 R16.2 TPS1.4 | length 115.4
  Top Layer w10: v1(2195,3455) 2220,3430 TPS1.4
  Bottom Layer w10: R15.1 v1(2195,3455)
NetR22_1: R22.1 S2.2
  other v1: 2898,2642
NetR26_2: R26.2 U1.2 | length 1261.9
  Top Layer w10: U1.2@2485,2450 v1(2485,2555)
  Bottom Layer w10: R26.2 2420,2620 v1(2485,2555)
NetR28_2: R28.2 U1.4 | length 1408.5
  Top Layer w10: U1.4@2585,2450 v1(2585,2580)
  Bottom Layer w10: R28.2@1350,2685 1375,2660 2505,2660 v1(2585,2580)
NetR29_2: R29.2 U1.6 | length 1532.8
  Top Layer w10: U1.6@2685,2450 v1(2685,2565)
  Bottom Layer w10: R29.2 1430,2685 2565,2685 v1(2685,2565) v1@2690,2560
NRST: C10.2 MCU1.7 R7.2 S1.1 | length 360.9
  Top Layer w10: v1(2675,2990) 2679,2994 2741,2994 ; S1.1@2705,2958 2741,2994 ; MCU1.7 2779.53,3124.53 2755,3100 2755,3008 2741,2994
  Bottom Layer w10: C10.2 2674,2989 v1(2675,2990)
PA15: MCU1.50
PB0: D9.K MCU1.26 | length 570.2
  Top Layer w10: MCU1.26 3059.53,2695.47 3180,2575 3278,2575 D9.K
PB3: MCU1.55
PB4: MCU1.56
PB5: MCU1.57
PC10: MCU1.51
PC11: MCU1.52
PGND: C11.1 C16.1 C17.2 C19.2 C22.2 C23.2 C24.2 C25.2 D2.1 D6.K D7.K D10.K FD.8 LDO1.1 LM1.2 MOS2.3 MOS4.3 MOS6.3 P4.5 P5.2 P7.4 R14.2 R16.1 R17.2 R22.2 TJA1.8 TPS1.6 U1.7 U1.8 | length 2041.9
  Bottom Layer w10: R22.2 2969,2624 C17.2 2975,2514 v1(2975,2450)
  Bottom Layer w100: P5.2 1650,3725 1977,3725 1977,3405 ; MOS4.3@1840,3115 1967,3115 1975,3123 1975,3405 MOS2.3 MOS2.3@1840,3405 ; MOS6.3 1977,2805 1977,3125
  other v1: 2825,2420 1950,2450 1430,2480 1895,2485 2150,2500 1895,2535 2135,2550 1855,2555 3580,3695 3510,3700 3585,3775 3440,3800 3445,3930
RES: MCU1.33 P6.5 | length 163.3
  Top Layer w10: MCU1.33 3287.64,2947.36 P6.5
RXD: MCU1.54 P2.3 | length 445.5
  Top Layer w10: MCU1.54 3079.21,3469.21 3125,3515 3300,3515 P2.3
SCLK: mag.4 MCU1.34 P6.3 | length 337.9
  Top Layer w10: MCU1.34 3292.05,2967.05 P6.3 3415,3055 mag.4
SWCLK: MCU1.49 P1.3 | length 316.2
  Top Layer w10: MCU1.49 3177.64,3442.64 3214,3479 3301,3479 P1.3
SWDIO: MCU1.46 P1.2 | length 295.4
  Top Layer w10: P1.2 3305,3375 3305,3227.91 3283.04,3205.95 MCU1.46@3257.68,3205.95
TIM4_CH1: MCU1.58 P7.3 R31.2 | length 751
  Top Layer w10: v1(3020,3385) 3000.47,3365.47 MCU1.58 3000.47,3289.53 3010,3280 3045,3280 v1(3070,3255)
  Bottom Layer w10: v1(3020,3385) 3020,3460 3050,3490 3050,3915 P7.3
TIM4_CH2: MCU1.59 P7.2 R30.2 | length 810.7
  Top Layer w10: v1(2855,3515) 2855,3419.47 2909.47,3365 2965,3365 2980.79,3349.21 MCU1.59 2980.79,3274.21 3000,3255 v1(3010,3255)
  Bottom Layer w10: v1(2855,3515) 2855,3780 2935,3860 P7.2
TXD: MCU1.53 P2.4 | length 519.8
  Top Layer w10: MCU1.53 3098.9,3458.9 3135,3495 3380,3495 P2.4
VIN: C22.1 C24.1 C25.1 MOS1.4 MOS3.4 MOS5.4 P5.1 R23.2 TPS1.7 | length 2788.1
  Top Layer w30: MOS1.4@1702,3578 C22.1 1989,3545 2090,3545 2120,3575 TPS1.7
  Top Layer w80: C25.1@1567.5,2512.5 1690,2635 ; MOS5.4 1690,2635 ; C24.1 1915,2635 1690,2635
  Top Layer w100: P5.1 1496.46,3783.54 MOS1.4@1702,3578 ; MOS5.4 MOS3.4 MOS1.4
  Bottom Layer w10: C24.1 2225,2325 R23.2@2455.2,2325
pads on no net: MCU1.8 MCU1.9 MCU1.10 MCU1.11 MCU1.22 MCU1.23 MCU1.24 MCU1.25 MCU1.38 MCU1.39 MCU1.40 MCU1.41 MCU1.42 MCU1.43 MCU1.61 MCU1.62 S1.0 TJA1.5 TPS1.2 TPS1.3 TPS1.5 U1.10
copper on no net:
  other v1: 3440,2340 3595,2480 1270,3770 1140,3775 1295,3915

## Polygon pours and split planes (outlines as drawn)
GND on Top Layer "Top Layer-No Net" (solid, remove dead copper, pour order 26): 2545,3630 2545,2815 2400,2815 2355,2770 2355,2640 3750,2640 3755,2635 3770,2650 3770,3640
PGND on Top Layer "Top Layer-No Net" (solid, remove dead copper, pour order 34): 815,4070 3740,4070 3785,4025 3785,2150 950,2150 945,2145
GND on Bottom Layer "GND_L02_P030" (solid, remove dead copper, pour order 30): 2550,3635 2550,2855 2640,2765 3290,2765 3355,2700 3770,2700 3770,3630 3760,3640
PGND on Bottom Layer "Top Layer-No Net" (solid, remove dead copper, pour order 32): 900,4090 930,4060 4000,4060 4000,2330 3790,2120 3775,2135 990,2135

## Keep-outs
Keep-Out Layer:
  lines w10: 1050,2445 1050,3545 1050,3815 cw(c1230,3815) 1230,3995 3480,3995 ; 1050,2450 ccw(c1230,2450) 1230,2270 ; 1225,2270 3480,2270 ; 3485,2270 ccw(c3485,2450) 3665,2450 ; 3485,3995 cw(c3485,3815) 3665,3815 ; 3665,2455 3665,3810

## Silkscreen, mask and mechanical layers (free items; w line width, h text height)
Top Overlay:
  circle w10: c3525,3860 r107
  circle w10: c1210,3855 r107
  circle w10: c3525,2400 r107
  text "5V" at 2805,3855 h30
  text "B" at 2920,3855 h30
  text "A" at 3025,3855 h30
  text "PGND" at 3100,3855 h30
  text "5V" at 2440,3815 h30
  text "3V3" at 2635,3815 h30
  text "-" at 1640,3705 h60
  text "H" at 1790,3705 h60
  text "L" at 1940,3705 h60
  text "+" at 1415,3695 h60
  text "C" at 1295,3620 h60 r270
  text "5V" at 3115,3615 h30
  text "GND" at 3200,3615 h30
  text "RX" at 3310,3615 h30
  text "TX" at 3410,3615 h30
  text "B" at 1290,3410 h60 r270
  text "3V3" at 3100,3360 h30
  text "DIO" at 3200,3360 h30
  text "SCK" at 3300,3360 h30
  text "GND" at 3420,3360 h30
  text "GND" at 3305,3290 h30 r270
  text "5V" at 3595,3280 h30 r270
  text "A" at 1290,3240 h60 r270
  text "MOSI" at 3595,3215 h30 r270
  text "3V3" at 3305,3195 h30 r270
  text "SCK" at 3305,3100 h30 r270
  text "MISO" at 3595,3100 h30 r270
  text "-" at 1060,3095 h60 r270
  text "-" at 1290,3090 h60 r270
  text "MOSI" at 3300,3000 h30 r270
  text "SCK" at 3595,2985 h30 r270
  text "HC" at 1290,2970 h60 r270
  text "RES" at 3300,2885 h30 r270
  text "PC6" at 3595,2885 h30 r270
  text "HB" at 1290,2810 h60 r270
  text "GND" at 3590,2790 h30 r270
  text "DC" at 3300,2775 h30 r270
  text "CSN" at 3300,2680 h30 r270
  text "HA" at 1290,2660 h60 r270
  text "5V" at 1295,2515 h60 r270
  text "VIN" at 2295,2310 h30
  text "12V" at 2810,2305 h30
Bottom Overlay:
  text "H" at 1825,3980 h60 r180
  text "L" at 1975,3980 h60 r180
  text "+" at 1475,3920 h60
  text "-" at 1630,3920 h60
  text "5V" at 2855,3855 h30
  text "B" at 2940,3855 h30
  text "A" at 3045,3855 h30
  text "PGND" at 3210,3855 h30
  text "C" at 1065,3555 h60 r270
  text "B" at 1060,3405 h60 r270
  text "A" at 1065,3250 h60 r270
  text "-" at 1070,3095 h60 r270
  text "HC" at 1070,2970 h60 r270
  text "HB" at 1070,2815 h60 r270
  text "HA" at 1070,2660 h60 r270
  text "BrushlessMotor Driver V1.5" at 2690,2620 h40
  text "5V" at 1065,2505 h60 r270
Top Solder:
  lines w60: 1180,3230 1325,3085 1325,2905 1430,2800 ; 1180,3383.54 1181.46,3383.54 1445,3120 1445,3100 ; 1180,3537.09 1297.91,3537.09 1430,3405
  lines w80: 1496.46,3875 1496.46,3783.54 1675,3605 1675,3550 1690,3535 1690,2855
Bottom Solder:
  lines w60: 1180,3230 1185,3230 1480,2935 ; 1180,3383.54 1276.46,3383.54 1485,3175 ; 1180,3537.09 1567.91,3537.09 1570,3535
  lines w80: 1650,3875 1650,3725 1970,3725 1970,3545 ; 1835,2805 1960,2805 ; 1845,3110 1950,3110 1955,3105 ; 1845,3405 1950,3405 ; 1970,2800 1970,3590